# Altium PCB carteAsserv.PcbDoc
Units mm, origin at the board's own origin, x right, y up, seen from the top; angles counter-clockwise.
Board outline 40.26 x 54.36 mm, 2 copper layers (Top Layer, Bottom Layer); 9 components, 9 nets, 65 pads, 9 vias.
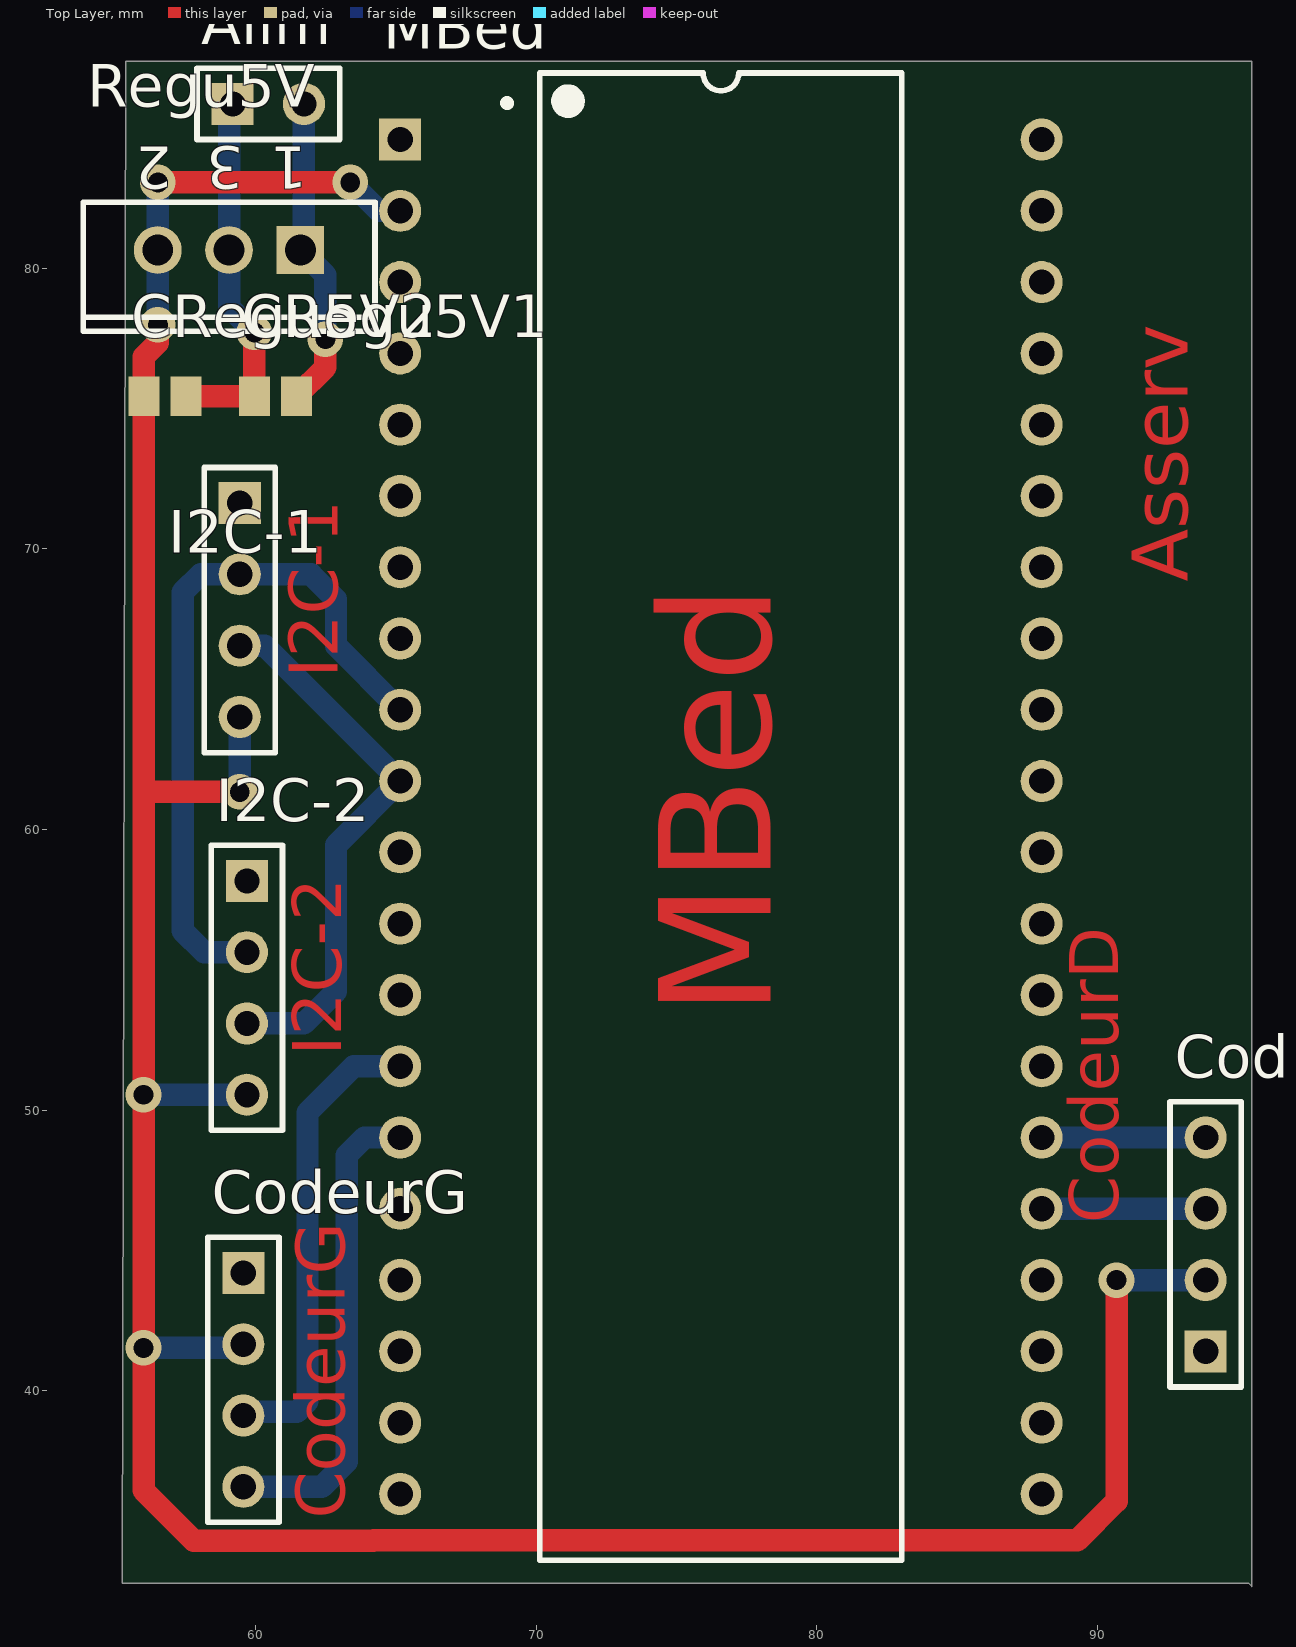
[diagram p0: Top Layer view]
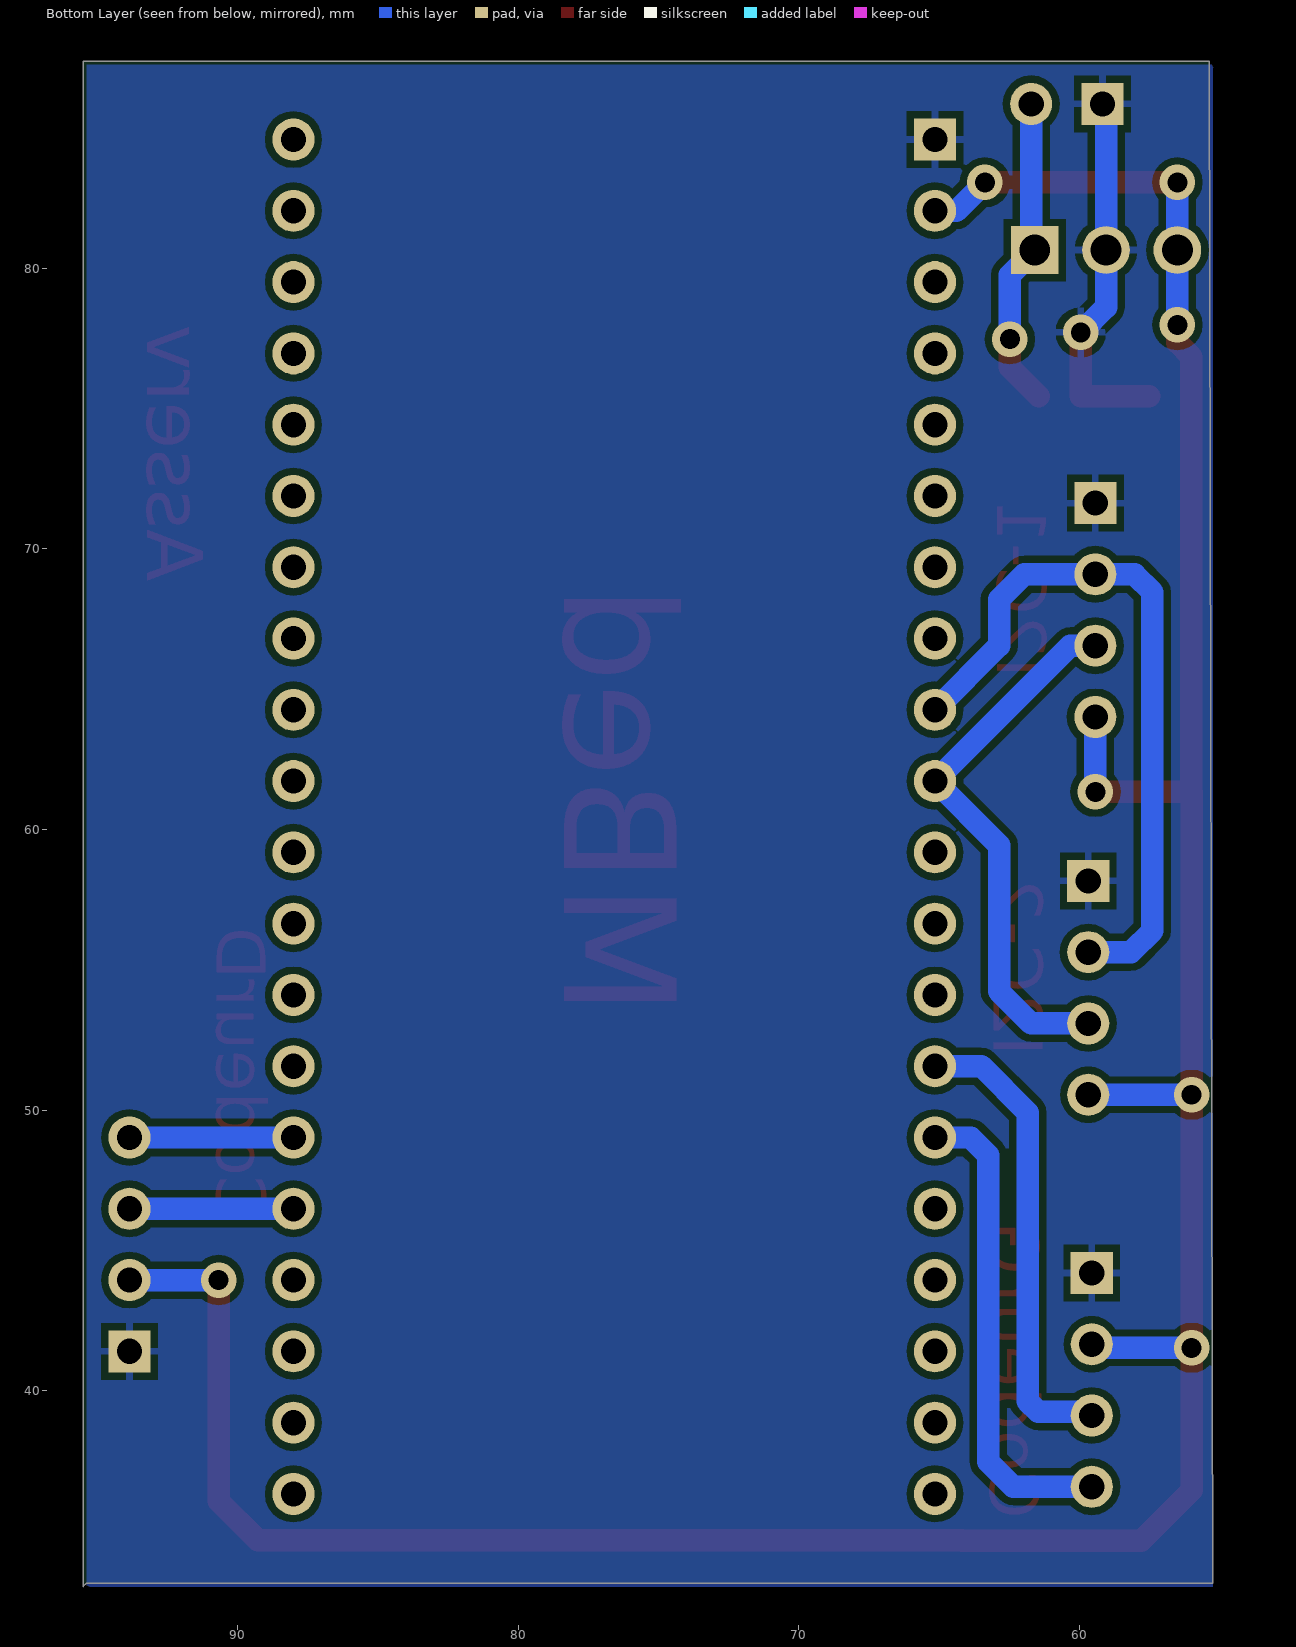
[diagram p1: Bottom Layer view, seen from below]

## Layer stack, top to bottom
Top Layer: signal copper 0.0356
Dielectric: dielectric 0.32, FR-4, Dk 4.8
Bottom Layer: signal copper 0.0356

## Board outline
55.372,87.376 95.504,87.376 95.504,33.02 95.377,33.147 55.245,33.147

## Design rules (kind name [scope] priority, off if disabled: settings)
Clearance [All] p1: gap=0.254
PolygonConnect [All] p1: connectstyle=Relief reliefconductorwidth=0.254 reliefentries=4 polygonreliefangle="90 Angle"
RoomDefinition carteAsserv [InComponentClass('carteAsserv')] p1: confinementstyle=ConfineIn formatcopy=TRUE lockcomponents=FALSE outline 178.943,26.924 288.29,26.924 288.29,83.058 178.943,83.058
RoutingVias [All] p1: holewidth=0.711 width=1.27 viastyle="Through Hole" minholewidth=0.711 minwidth=1.27 maxholewidth=0.711 maxwidth=1.27
SilkscreenOverComponentPads [All] p1: minsilkscreentomaskgap=0.254
SolderMaskExpansion [All] p1: expansion=0.102
Width [All] p1: maxlimit=1 minlimit=0.8 preferedwidth=0.8
27 further rules are at their usual default settings.

## Components (designator, comment, footprint, x,y, rotation, side; value= is the part's Value field where it differs from the comment)
Alim "Header 2" HDR1X2 59.182,85.852 r0 top
CodeurD "Header 4" HDR1X4 93.853,41.402 r90 top
CodeurG "Header 4" HDR1X4 59.563,44.196 r270 top
CRegu5V1 "Cap" C0805 60.706,75.438 r0 top
CRegu5V2 "Cap" C0805 56.769,75.438 r180 top
I2C-1 "Header 4" HDR1X4 59.436,71.628 r270 top
I2C-2 "Header 4" HDR1X4 59.69,58.166 r270 top
MBed "ATmega162V-8PU" MBed 76.581,60.452 r0 top
Regu5V "L78M05CV" TO220V 59.055,80.645 r180 top

## Footprints (in the part's own frame and the unit in brackets; to place one, negate y for a bottom-side part, rotate by r counter-clockwise, add the part's x,y. Pads: shape width x height; smd on the part's side, far side on the other; paste and mask are expansions set on the pad)
C0805 [mm] "Chip Capacitor, Body 2.0x1.3mm, IPC High Density"
  rect 1.1x1.4 smd: 1(-0.75,0) 2(0.75,0)
  body extent -1.1,-0.72 1.1,0.72, height 1.4
HDR1X2 [mm] "Connector; Header; 2 Position"
  rect 1.5x1.5 hole 0.9: 1(0,0)
  round 1.5 hole 0.9: 2(2.54,0)
  silkscreen extent -1.27,-1.27 3.81,1.27
HDR1X4 [mm] "Connector; Header; 4 Position"
  rect 1.5x1.5 hole 0.9: 1(0,0)
  round 1.5 hole 0.9: 2(2.54,0) 3(5.08,0) 4(7.62,0)
  silkscreen extent -1.27,-1.27 8.89,1.27
MBed [mm]
  rect 1.5x1.5 hole 0.9: 1(-11.43,24.13)
  round 1.5 hole 0.9: 2(-11.43,21.59) 3(-11.43,19.05) 4(-11.43,16.51) 5(-11.43,13.97) 6(-11.43,11.43) 7(-11.43,8.89) 8(-11.43,6.35) 9(-11.43,3.81) 10(-11.43,1.27) 11(-11.43,-1.27) 12(-11.43,-3.81) 13(-11.43,-6.35) 14(-11.43,-8.89) 15(-11.43,-11.43) 16(-11.43,-13.97) 17(-11.43,-16.51) 18(-11.43,-19.05) 19(-11.43,-21.59) 20(-11.43,-24.13) 21(11.43,-24.13) 22(11.43,-21.59) 23(11.43,-19.05) 24(11.43,-16.51) 25(11.43,-13.97) 26(11.43,-11.43) 27(11.43,-8.89) 28(11.43,-6.35) 29(11.43,-3.81) 30(11.43,-1.27) 31(11.43,1.27) 32(11.43,3.81) 33(11.43,6.35) 34(11.43,8.89) 35(11.43,11.43) 36(11.43,13.97) 37(11.43,16.51) 38(11.43,19.05) 39(11.43,21.59) 40(11.43,24.13)
  silkscreen extent -7.74,-26.5 6.45,26.5, body extent -7.05,-26.47 7.05,26.47, height 4.83
TO220V [mm] "TO, Thru-Hole, Vertical, Heatsink Mounted; 3 In-Line Leads; Pitch 2.54 mm; Pin sequence 1, 3, 2"
  rect 1.7x1.7 hole 1.1: 1(-2.54,0)
  round 1.7 hole 1.1: 2(2.54,0) 3(0,0)
  silkscreen extent -5.2,-1.7 5.2,2.9

## Part data
Alim: "Header, 2-Pin"
CodeurD CodeurG I2C-1 I2C-2: "Header, 4-Pin"
CRegu5V1 CRegu5V2: "Capacitor"
MBed: "8-bit AVR Microcontroller, 16KB Flash, 512 Bytes EEPROM, 1KB SRAM, 40-pin PDIP, Industrial Grade (-40°C to 85°C)"
Regu5V: "Positive Voltage Regulator"

## Via types
v1: diameter 1.27, hole 0.711, Top Layer to Bottom Layer, 9 vias

## Nets (pads, with @x,y where several pads share a name; then routed paths per layer and width w, separated by ;. In a path a pad name is that pad's centre, name@x,y a point inside that pad or via, vN(x,y) a via of type N, cw(c..) or ccw(c..) an arc to the next point about the centre after c; other vN are vias at no path point)
5V: CodeurD.2 CodeurG.2 CRegu5V2.2 I2C-1.4 I2C-2.4 MBed.2 Regu5V.2 | length 116.1
  Top Layer w0.8: 56.019,61.353 CRegu5V2.2 56.019,76.847 56.515,77.343 v1(56.515,77.978) ; v1(56.515,83.058) v1(63.373,83.058) ; v1(59.436,61.341) 56.007,61.341 v1(56.007,50.546) v1(56.007,41.529) 56.007,36.449 57.804,34.652 64.184,34.652 64.203,34.671 89.281,34.671 90.678,36.068 v1(90.678,43.942)
  Bottom Layer w0.8: v1(56.007,41.529) CodeurG.2@59.436,41.529 ; v1(56.007,50.546) I2C-2.4 ; v1(56.515,77.978) Regu5V.2 v1(56.515,83.058) ; v1(59.436,61.341) I2C-1.4 ; v1(63.373,83.058) 64.389,82.042 MBed.2 ; v1(90.678,43.942) CodeurD.2
GND: Alim.1 CodeurD.1 CodeurG.1 CRegu5V1.1 CRegu5V2.1 I2C-1.1 I2C-2.1 MBed.1 Regu5V.3 | length 13.1
  Top Layer w0.8: CRegu5V2.1 CRegu5V1.1 v1(59.956,77.712)
  Bottom Layer w0.8: Alim.1@59.055,85.725 Regu5V.3 59.055,78.613 v1(59.956,77.712)
NetAlim_2: Alim.2 CRegu5V1.2 Regu5V.1 | length 11.1
  Top Layer w0.8: CRegu5V1.2 62.484,76.466 v1(62.484,77.47)
  Bottom Layer w0.8: Regu5V.1 62.484,79.756 v1(62.484,77.47) ; Regu5V.1@61.722,80.772 Alim.2
P14: CodeurG.3 MBed.14 | length 16.8
  Bottom Layer w0.8: CodeurG.3 59.69,39.243 61.468,39.243 61.849,39.624 61.849,49.911 63.5,51.562 MBed.14
P15: CodeurG.4 MBed.15 | length 17.1
  Bottom Layer w0.8: CodeurG.4 62.357,36.576 63.246,37.465 63.246,48.387 63.881,49.022 MBed.15
P25: CodeurD.3 MBed.25 | length 5.8
  Bottom Layer w0.8: MBed.25 CodeurD.3
P26: CodeurD.4 MBed.26 | length 5.8
  Bottom Layer w0.8: MBed.26 CodeurD.4
SCL: I2C-1.3 I2C-2.3 MBed.10 | length 19.8
  Bottom Layer w0.8: I2C-1.3 60.325,66.548 MBed.10 62.865,59.436 62.865,54.229 61.722,53.086 I2C-2.3
SDA: I2C-1.2 I2C-2.2 MBed.9 | length 25.6
  Bottom Layer w0.8: I2C-2.2 58.166,55.626 57.404,56.388 57.404,68.453 58.039,69.088 I2C-1.2 61.976,69.088 62.865,68.199 62.865,66.548 MBed.9
pads on no net: MBed.3 MBed.4 MBed.5 MBed.6 MBed.7 MBed.8 MBed.11 MBed.12 MBed.13 MBed.16 MBed.17 MBed.18 MBed.19 MBed.20 MBed.21 MBed.22 MBed.23 MBed.24 MBed.27 MBed.28 MBed.29 MBed.30 MBed.31 MBed.32 MBed.33 MBed.34 MBed.35 MBed.36 MBed.37 MBed.38 MBed.39 MBed.40

## Polygon pours and split planes (outlines as drawn)
GND on Bottom Layer "Bottom Layer-No Net" (solid, pour order 3): 55.118,87.249 95.377,87.249 95.377,32.893 95.25,33.02 55.245,33.02 55.245,87.122

## Other copper
Top Layer:
  text "Asserv" at 93.218,68.834 h2 r90
  text "I2C-1" at 63.5,65.405 h3 r90
  text "MBed" at 78.359,53.34 h4 r90
  text "I2C-2" at 63.627,51.943 h3 r90
  text "CodeurD" at 91.313,45.974 h3 r90
  text "CodeurG" at 63.754,35.433 h3 r90

## Text inside footprints (layer, text, board x,y; h text height)
Regu5V: Top Overlay "3" at 59.555,84.32 h1.5 r180; Top Overlay "2" at 57.015,84.32 h1.5 r180; Top Overlay "1" at 61.845,84.32 h1.5 r180